# Altium PCB DC-DC-Filter PCB.PcbDoc
Units mil, origin at the board's own origin, x right, y up, seen from the top; angles counter-clockwise.
Board outline 6003.94 x 1080 mil, 2 copper layers (Top Layer, Bottom Layer); 23 components, 9 nets, 52 pads, 4 vias.
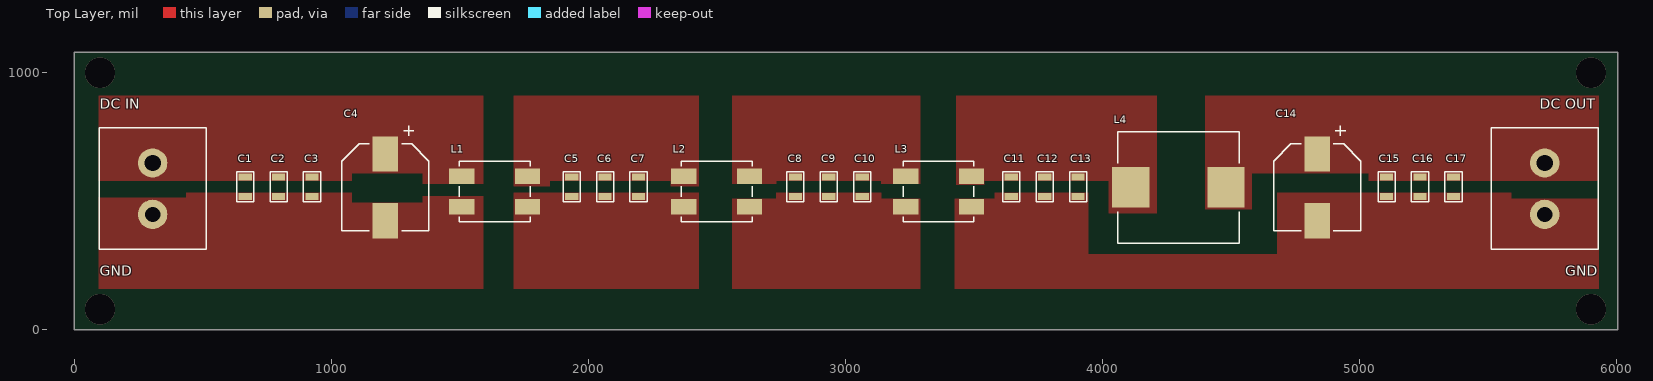
[diagram p0: Top Layer view]
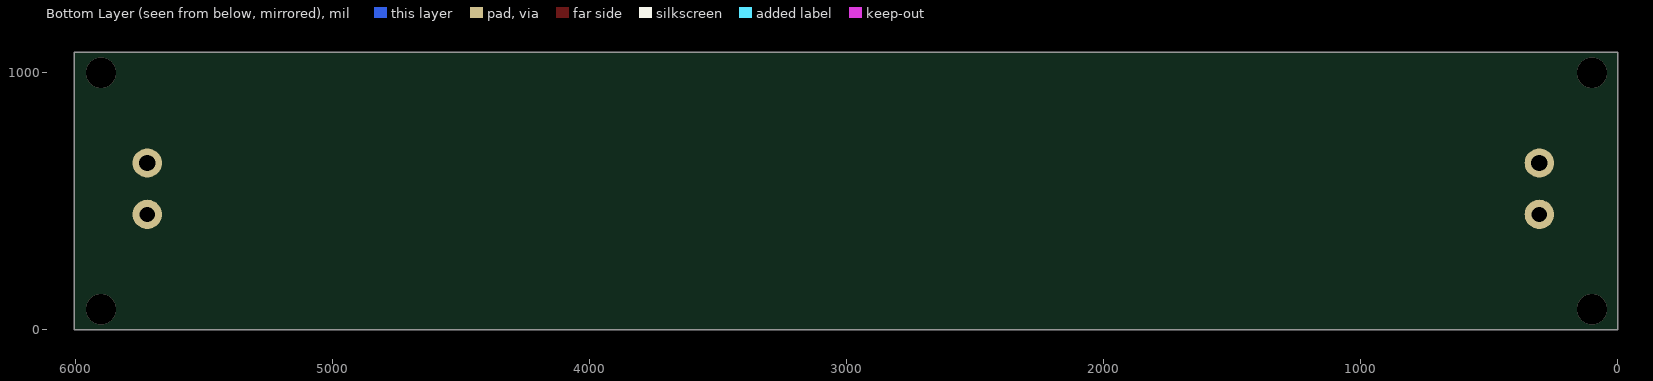
[diagram p1: Bottom Layer view, seen from below]
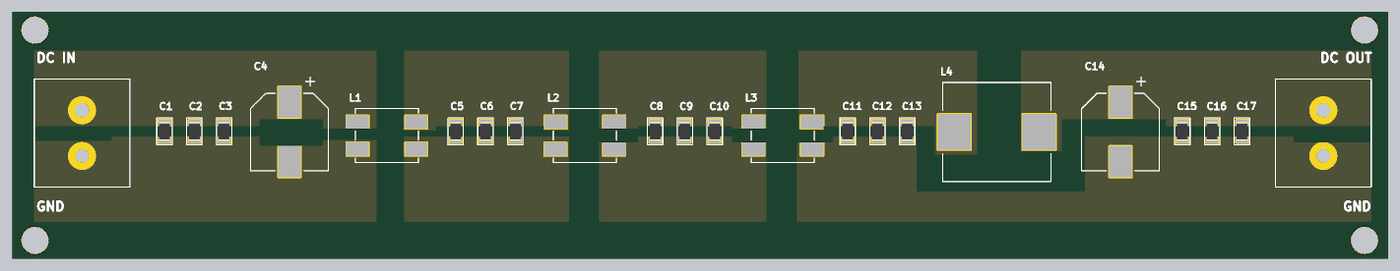
[diagram p2: 3D render of the assembled board from above, using the file's embedded part models]

## Layer stack, top to bottom
Top Solder: solder mask 0.4, Solder Resist, Dk 3.5
Top Layer: signal copper 1.4
Dielectric 1: dielectric 12.6, FR-4, Dk 4.8
Bottom Layer: signal copper 1.4
Bottom Solder: solder mask 0.4, Solder Resist, Dk 3.5

## Board outline
0,0 6003.94,0 6003.94,1080 0,1080

## Design rules (kind name [scope] priority, off if disabled: settings)
Clearance [All] p1: gap=10 ignorepadtopadclearanceinfootprint=FALSE except(0: Arc-Hole Track-Hole SMDPad-Hole THPad-Hole Via-Hole Fill-Hole Poly-Hole Region-Hole Text-Hole)
PolygonConnect [All] p1: connectstyle=Direct reliefconductorwidth=10 reliefentries=4 polygonreliefangle="90 Angle" airgapwidth=10
RoutingVias [All] p1: holewidth=28 width=50 viastyle="Through Hole" minholewidth=28 minwidth=50 maxholewidth=28 maxwidth=50
SolderMaskExpansion [All] p1: expansion=4
Width [All] p1: maxlimit=10 minlimit=10 preferedwidth=10
30 further rules are at their usual default settings.

## Components (designator, comment, footprint, x,y, rotation, side; value= is the part's Value field where it differs from the comment)
C1 "10nF" CAP805 665,556.77 r90 top
C2 "1uF" CAP805 795,556.77 r90 top
C3 "100nF" CAP805 925,556.77 r90 top
C4 "100uF" "V-CHIP CAP" 1210,554.37 r0 top
C5 "10nF" CAP805 1935,556.77 r90 top
C6 "1uF" CAP805 2065,556.77 r90 top
C7 "100nF" CAP805 2195,556.77 r90 top
C8 "10nF" CAP805 2805,556.77 r90 top
C9 "1uF" CAP805 2935,556.77 r90 top
C10 "100nF" CAP805 3065,556.77 r90 top
C11 "10nF" CAP805 3645,556.77 r90 top
C12 "1uF" CAP805 3775,556.77 r90 top
C13 "100nF" CAP805 3905,556.77 r90 top
C14 "100uF" "V-CHIP CAP" 4835,554.37 r0 top
C15 "10nF" CAP805 5105,556.77 r90 top
C16 "1uF" CAP805 5235,556.77 r90 top
C17 "100nF" CAP805 5365,556.77 r90 top
"DC IN" "2 Pin Header" 2POS_5.08mm_Terminal 305,549.37 r270 top (schematic designator J1)
"DC OUT" "2 Pin Header" 2POS_5.08mm_Terminal 5720,549.37 r270 top (schematic designator J2)
L1 "CMF" CMF 1635,538.43 r0 top
L2 "CMF" CMF 2498.52,538.43 r0 top
L3 "CMF" CMF 3362.05,538.43 r0 top
L4 "Inductor" Inductor 4295.04,554.37 r0 top

## Footprints (in the part's own frame and the unit in brackets; to place one, negate y for a bottom-side part, rotate by r counter-clockwise, add the part's x,y. Pads: shape width x height; smd on the part's side, far side on the other; paste and mask are expansions set on the pad)
2POS_5.08mm_Terminal [mm]
  round 2.9 hole 1.6: 1(-2.54,0)
  round 2.9 hole 1.5: 2(2.54,0)
  silkscreen extent -6,-5.3 6,5.3
CAP805 [mm]
  rect 0.7x1.3 smd: 1(-0.95,0) 2(0.95,0)
  silkscreen extent -1.5,-0.85 1.5,0.85, body extent -1,-0.6 1,0.6, height 0.45
CMF [mm]
  rect 2.5x1.5 smd: 1(-3.25,1.5) 2(-3.25,-1.5) 3(3.25,-1.5) 4(3.25,1.5)
  silkscreen extent -3.5,-3 3.5,3
Inductor [mm]
  rect 3.7x4 smd: 1(-4.7,0) 2(4.7,0)
  silkscreen extent -6,-5.5 6,5.5
"V-CHIP CAP" [mm]
  rect 2.5x3.5 smd: 1(0,3.3) 2(0,-3.3)
  silkscreen extent -4.3,-4.3 4.3,6.1

## Part data
C1 C2 C3 C5 C6 C7 C8 C9 C10 C11 C12 C13 C15 C16 C17: library part Capacitor
C4 C14: library part "Cap pol"

## Via types
v1: diameter 118.11, hole 118.11, Top Layer to Bottom Layer, 4 vias

## Nets (pads, with @x,y where several pads share a name; then routed paths per layer and width w, separated by ;. In a path a pad name is that pad's centre, name@x,y a point inside that pad or via, vN(x,y) a via of type N, cw(c..) or ccw(c..) an arc to the next point about the centre after c; other vN are vias at no path point)
GND: C5.1 C6.1 C7.1 L1.3 L2.2
NetC1_1: "DC IN.2" C1.1 C2.1 C3.1 C4.2 L1.2
NetC1_2: "DC IN.1" C1.2 C2.2 C3.2 C4.1 L1.1
NetC5_2: C5.2 C6.2 C7.2 L1.4 L2.1
NetC8_1: C8.1 C9.1 C10.1 L2.3 L3.2
NetC8_2: C8.2 C9.2 C10.2 L2.4 L3.1
NetC11_1: "DC OUT.2" C11.1 C12.1 C13.1 C14.2 C15.1 C16.1 C17.1 L3.3
NetC11_2: C11.2 C12.2 C13.2 L3.4 L4.1
NetC14_1: "DC OUT.1" C14.1 C15.2 C16.2 C17.2 L4.2
copper on no net:
  other v1: 100,80 5900,80 100,1000 5900,1000

## Polygon pours and split planes (outlines as drawn)
NetC1_2 on Top Layer "Top Layer-NetC1_2" (solid, pour order 32): 610,579.37 1080,579.37 1080,609.37 1355,609.37 1355,569.37 1590,569.37 1590,910 95,910 95,579.37
NetC14_1 on Top Layer "Top Layer-NetC14_1" (solid, pour order 28): 4400,469.37 4580,469.37 4580,609.37 5035,609.37 5035,579.37 5925,579.37 5930,584.37 5930,910 4400,910
NetC11_1 on Top Layer "Top Layer-NetC11_1" (solid, pour order 26): 3425,509.37 3580,509.37 3580,534.37 3945,534.37 3945,294.37 4680,294.37 4680,534.37 4930,534.37 5590,534.37 5590,509.37 5930,509.37 5930,160 3425,160
NetC1_1 on Top Layer "Top Layer-NetC1_1" (solid, pour order 38): 95,514.37 435,514.37 435,534.37 1080,534.37 1080,494.37 1355,494.37 1355,519.37 1590,519.37 1590,160 95,160
no net on Top Layer "Top Layer-No Net" (solid, pour order 36): 100,499.37
NetC11_2 on Top Layer "Top Layer-NetC11_2" (solid, pour order 24): 3430,910 4210,910 4210,454.37 4025,454.37 4025,579.37 3540,579.37 3540,564.37 3430,564.37
NetC8_1 on Top Layer "Top Layer-NetC8_1" (solid, pour order 20): 2560,509.37 2730,509.37 2730,534.37 3140,534.37 3140,509.37 3290,509.37 3290,160 2560,160
NetC8_2 on Top Layer "Top Layer-NetC8_2" (solid, pour order 18): 2560,569.37 2730,569.37 2730,579.37 3140,579.37 3140,569.37 3290,569.37 3290,910 2560,910
no net on Top Layer "Top Layer-No Net 1" (solid, pour order 16): 2580,569.37
no net on Top Layer "Top Layer-No Net 2" (solid, pour order 10): 1850,519.37
GND on Top Layer "Top Layer-GND" (solid, pour order 8): 1710,534.37 1850,534.37 2430,534.37 2430,160 1710,160
NetC5_2 on Top Layer "Top Layer-NetC5_2" (solid, pour order 6): 1710,559.37 1850,559.37 1850,579.37 2320,579.37 2320,559.37 2430,559.37 2430,910 1710,910

## Silkscreen, mask and mechanical layers (free items; w line width, h text height)
Top Overlay:
  text "GND" at 100,210 h40
  text "GND" at 5800,210 h40
Mechanical 1:
  lines w4.92: 0,0 0,1080 6005,1080 6005,0 0,0